# Altium PCB FPC_ADAPTOR.PcbDoc
Units mm, origin at the board's own origin, x right, y up, seen from the top; angles counter-clockwise.
Board outline 28.78 x 53.72 mm, 2 copper layers (Top Layer, Bottom Layer), stack 1.569 mm thick; 2 components, 40 nets, 82 pads, 0 vias.
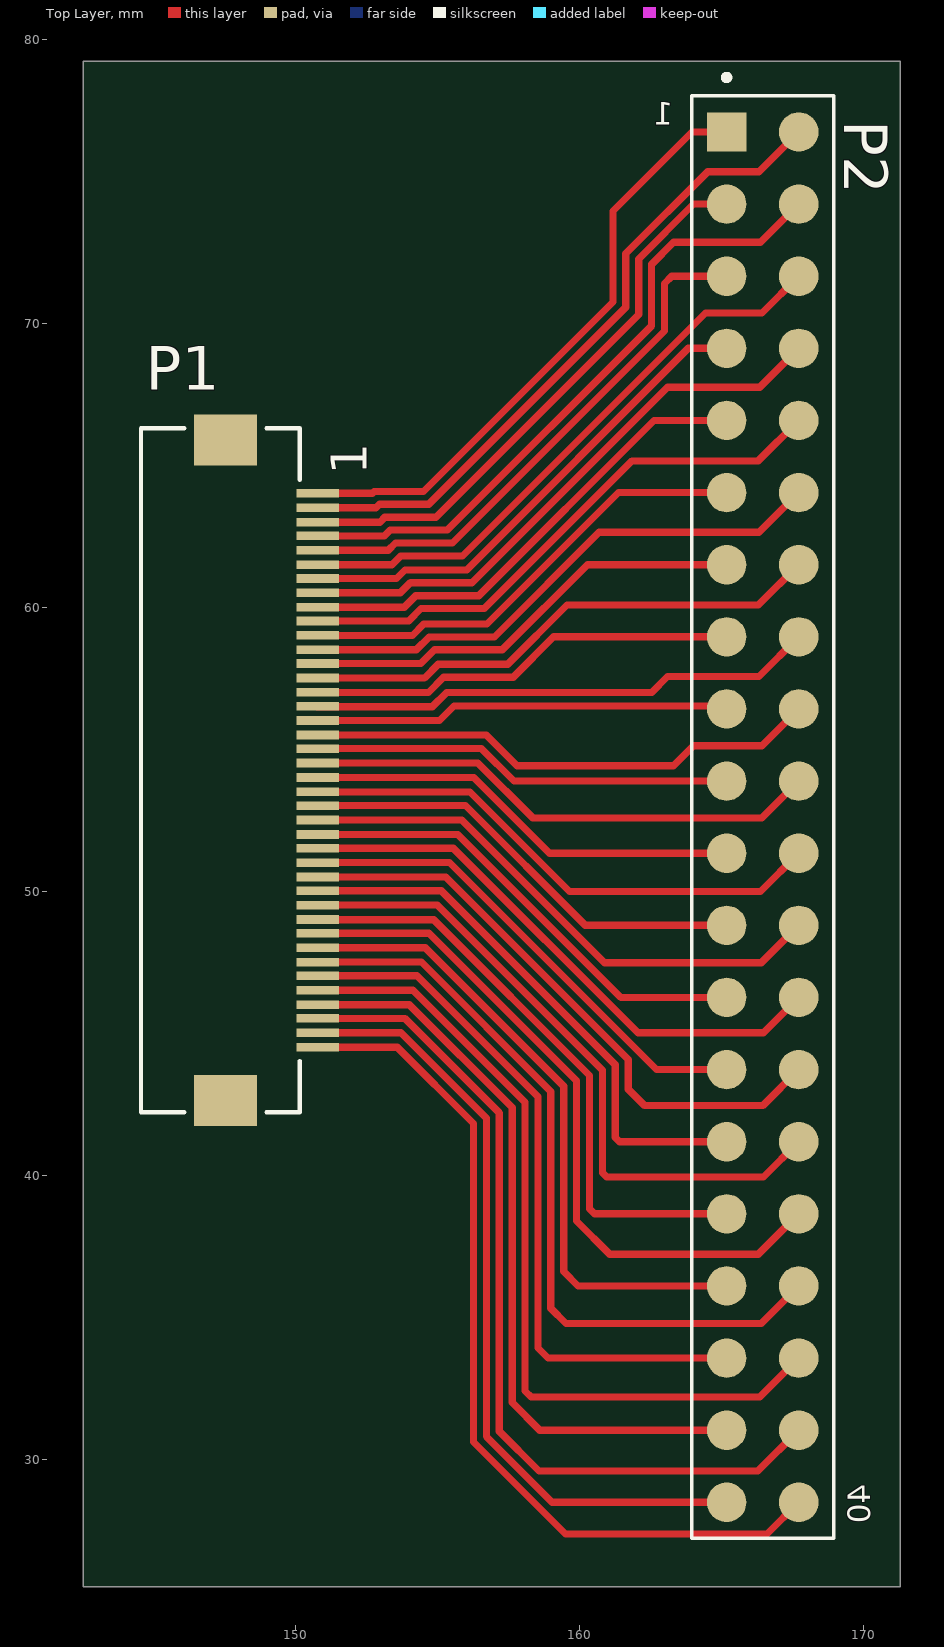
[diagram p0: Top Layer view]
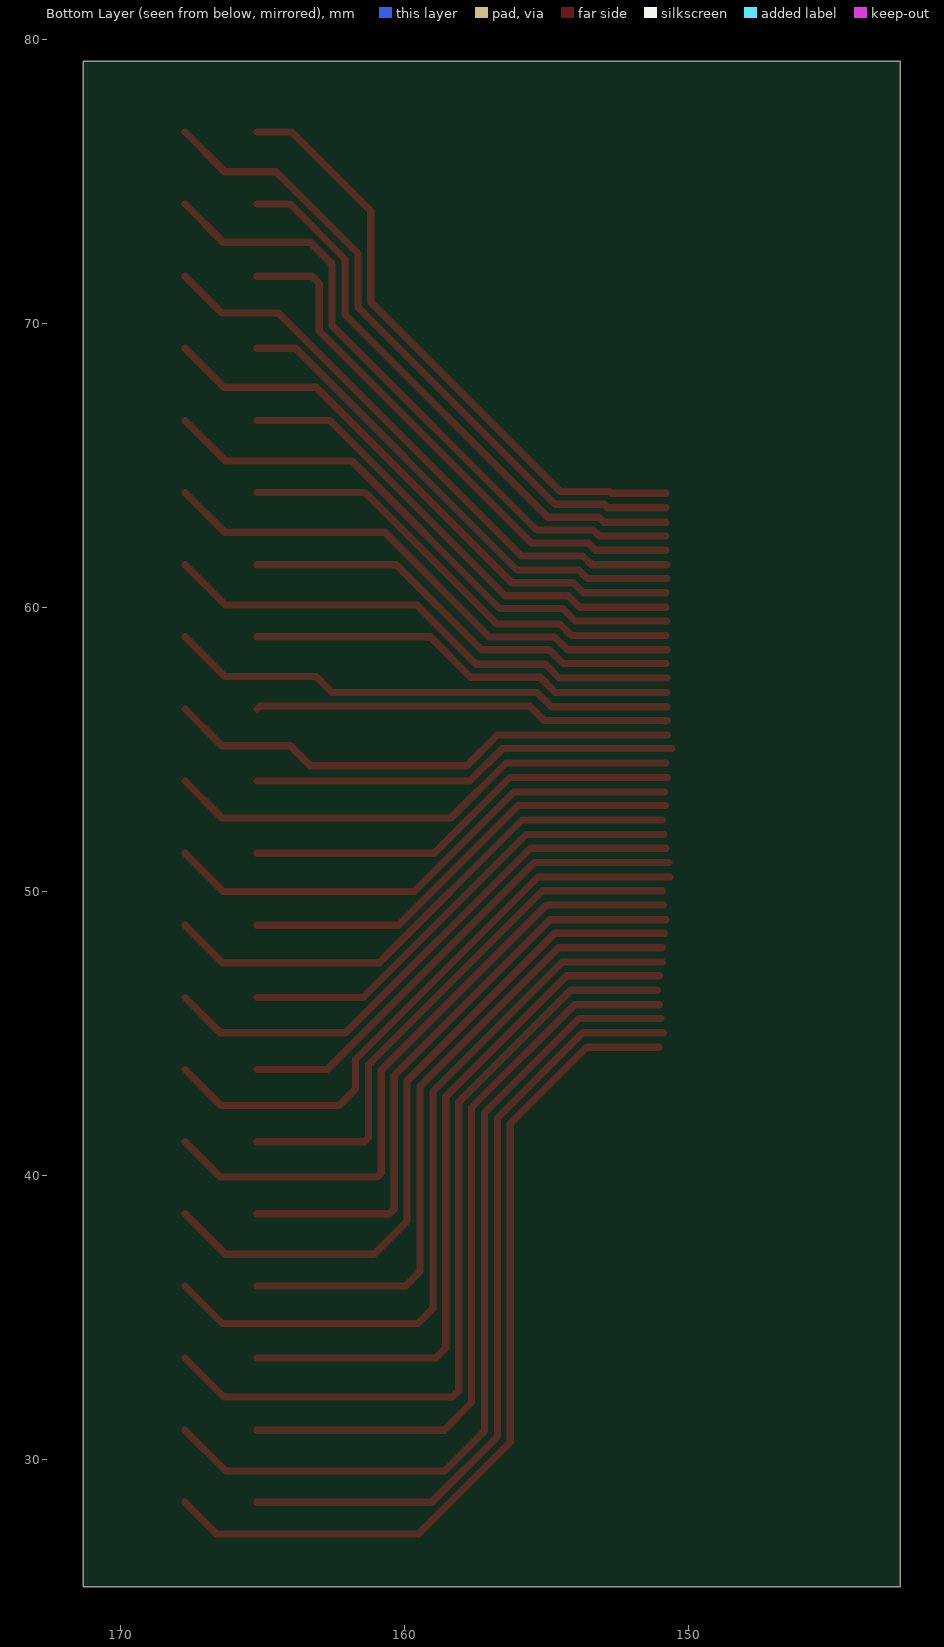
[diagram p1: Bottom Layer view, seen from below]

## Layer stack, top to bottom
Top Solder: solder mask 0.0254, SM-001, Dk 4
Top Layer: signal copper 0.035
Dielectric 1: core 1.4986, Core-043, Dk 4.3
Bottom Layer: signal copper 0.035
Bottom Solder: solder mask 0.0254, SM-001, Dk 4

## Board outline
142.519,25.527 142.519,79.248 171.298,79.248 171.298,25.527

## Design rules (kind name [scope] priority, off if disabled: settings)
Clearance [All] p1: gap=0.2 ignorepadtopadclearanceinfootprint=TRUE
PolygonConnect [All] p1: connectstyle=Relief reliefconductorwidth=0.254 reliefentries=4 polygonreliefangle="90 Angle" airgapwidth=0.254
RoutingVias [All] p1: holewidth=0.711 width=1.27 viastyle="Through Hole" minholewidth=0.711 minwidth=1.27 maxholewidth=0.711 maxwidth=1.27
SolderMaskExpansion [All] p1: expansion=0.102 istentingtop=FALSE
Width [All] p1: maxlimit=0.254 minlimit=0.01 preferedwidth=0.254 minimp=50.000000 maximp=50.000000 favimp=50.000000
30 further rules are at their usual default settings.

## Components (designator, comment, footprint, x,y, rotation, side; value= is the part's Value field where it differs from the comment)
P1 "FPC-40PIN" FPC-40PIN-0.5MM 147.542,53.458 r90 top
P2 "20X2" 2X20_FPC 166.466,52.724 r270 top value="20x2 header"

## Footprints (in the part's own frame and the unit in brackets; to place one, negate y for a bottom-side part, rotate by r counter-clockwise, add the part's x,y. Pads: shape width x height; smd on the part's side, far side on the other; paste and mask are expansions set on the pad)
2X20_FPC [mm]
  rect 1.39x1.39 smd: 1(-24.035,-1.29)
  round 1.39 smd: 2(-24.035,1.25) 3(-21.495,-1.29) 4(-21.495,1.25) 5(-18.955,-1.29) 6(-18.955,1.25) 7(-16.415,-1.29) 8(-16.415,1.25) 9(-13.875,-1.29) 10(-13.875,1.25) 11(-11.335,-1.29) 12(-11.335,1.25) 13(-8.795,-1.29) 14(-8.795,1.25) 15(-6.255,-1.29) 16(-6.255,1.25) 17(-3.715,-1.29) 18(-3.715,1.25) 19(-1.175,-1.29) 20(-1.175,1.25) 21(1.365,-1.29) 22(1.365,1.25) 23(3.905,-1.29) 24(3.905,1.25) 25(6.445,-1.29) 26(6.445,1.25) 27(8.985,-1.29) 28(8.985,1.25) 29(11.525,-1.29) 30(11.525,1.25) 31(14.065,-1.29) 32(14.065,1.25) 33(16.605,-1.29) 34(16.605,1.25) 35(19.145,-1.29) 36(19.145,1.25) 37(21.685,-1.29) 38(21.685,1.25) 39(24.225,-1.29) 40(24.225,1.25)
  silkscreen extent -26.05,-2.52 25.5,2.48
FPC-40PIN-0.5MM [mil]
  rect 12x59 smd: 1(416.36,-127.24) 2(396.36,-127.24) 3(376.36,-127.24) 4(357.36,-127.24) 5(337.36,-127.24) 6(317.36,-127.24) 7(298.36,-127.24) 8(278.36,-127.24) 9(258.36,-127.24) 10(239.36,-127.24) 11(219.36,-127.24) 12(199.36,-127.24) 13(180.36,-127.24) 14(160.36,-127.24) 15(140.36,-127.24) 16(121.36,-127.24) 17(101.36,-127.24) 18(81.36,-127.24) 19(62.36,-127.24) 20(42.36,-127.24) 21(22.36,-127.24) 22(2.36,-127.24) 23(-16.64,-127.24) 24(-36.64,-127.24) 25(-56.64,-127.24) 26(-75.64,-127.24) 27(-95.64,-127.24) 28(-115.64,-127.24) 29(-134.64,-127.24) 30(-154.64,-127.24) 31(-174.64,-127.24) 32(-193.64,-127.24) 33(-213.64,-127.24) 34(-233.64,-127.24) 35(-252.64,-127.24) 36(-272.64,-127.24) 37(-292.64,-127.24) 38(-311.64,-127.24) 39(-331.64,-127.24) 40(-351.64,-127.24)
  rect 71x87 smd: ""(-425.64,0.76) ""(490.36,0.76)
  silkscreen extent -442,-102 506,118

## Nets (pads, with @x,y where several pads share a name; then routed paths per layer and width w, separated by ;. In a path a pad name is that pad's centre, name@x,y a point inside that pad or via, vN(x,y) a via of type N, cw(c..) or ccw(c..) an arc to the next point about the centre after c; other vN are vias at no path point)
1: P1.1 P2.1 | length 21.5
  Top Layer w0.254: P1.1 152.696,64.033 152.762,64.099 154.498,64.099 161.173,70.774 161.173,73.974 163.957,76.759 P2.1
2: P1.2 P2.2 | length 23.5
  Top Layer w0.254: P1.2 152.83,63.525 152.95,63.645 154.686,63.645 161.627,70.586 161.627,72.476 164.512,75.362 166.319,75.362 P2.2
3: P1.3 P2.3 | length 20.2
  Top Layer w0.254: P1.3 152.964,63.017 153.138,63.191 154.94,63.191 162.081,70.332 162.081,72.288 164.011,74.219 P2.3
4: P1.4 P2.4 | length 23
  Top Layer w0.254: P1.4 153.124,62.535 153.326,62.737 155.336,62.737 162.535,69.936 162.535,72.1 163.307,72.873 166.37,72.873 P2.4
5: P1.5 P2.5 | length 19.4
  Top Layer w0.254: P1.5 153.258,62.027 153.514,62.283 155.524,62.283 162.989,69.748 162.989,71.422 163.246,71.679 P2.5
6: P1.6 P2.6 | length 21.2
  Top Layer w0.254: P1.6@150.749,61.519 P1.6 153.392,61.519 153.702,61.829 155.874,61.829 164.428,70.383 166.421,70.383 P2.6
7: P1.7 P2.7 | length 17.8
  Top Layer w0.254: P1.7@150.749,61.036 P1.7 153.551,61.036 153.85,61.335 156.022,61.335 163.826,69.139 P2.7
8: P1.8 P2.8 | length 20.5
  Top Layer w0.254: P1.8 153.685,60.528 154.038,60.881 156.21,60.881 163.096,67.767 166.345,67.767 P2.8
9: P1.9 P2.9 | length 17.1
  Top Layer w0.254: P1.9 153.819,60.02 154.226,60.427 156.45,60.427 162.622,66.599 P2.9
10: P1.10 P2.10 | length 19.9
  Top Layer w0.254: P1.10@150.749,59.538 P1.10 153.979,59.538 154.414,59.973 156.638,59.973 161.842,65.176 166.294,65.176 P2.10
11: P1.11 P2.11 | length 16.5
  Top Layer w0.254: P1.11 154.113,59.03 154.513,59.43 156.737,59.43 161.366,64.059 P2.11
12: P1.12 P2.12 | length 19.3
  Top Layer w0.254: P1.12@150.749,58.522 P1.12 154.247,58.522 154.701,58.976 156.997,58.976 160.684,62.662 166.319,62.662 P2.12
13: P1.13 P2.13 | length 15.8
  Top Layer w0.254: P1.13 154.406,58.039 154.889,58.522 157.277,58.522 160.274,61.519 P2.13
14: P1.14 P2.14 | length 18.6
  Top Layer w0.254: P1.14@150.749,57.531 P1.14 154.54,57.531 155.02,58.01 157.47,58.01 159.556,60.096 166.294,60.096 P2.14
15: P1.15 P2.15 | length 15.2
  Top Layer w0.254: P1.15@150.749,57.023 P1.15 154.674,57.023 155.208,57.556 157.658,57.556 159.08,58.979 P2.15
16: P1.16 P2.16 | length 18
  Top Layer w0.254: P1.16@150.749,56.515 154.808,56.515 155.316,57.023 162.538,57.023 163.097,57.582 166.319,57.582 P2.16
17: P1.17 P2.17 | length 14.7
  Top Layer w0.254: P1.17@150.724,56.032 P1.17 ; P1.17@150.8,56.007 P1.17 ; P2.17 165.075,56.54 155.575,56.54 155.067,56.032 P1.17
18: P1.18 P2.18 | length 18.3
  Top Layer w0.254: P1.18@150.724,55.524 P1.18 156.707,55.524 157.792,54.439 163.304,54.439 164.008,55.143 166.421,55.143 P2.18
19: P1.19 P2.19 | length 15.1
  Top Layer w0.254: P1.19@150.571,55.042 P1.19 156.547,55.042 157.69,53.899 P2.19
20: P1.20 P2.20 | length 18.3
  Top Layer w0.254: P1.20 156.413,54.534 158.344,52.603 166.421,52.603 P2.20
21: P1.21 P2.21 | length 15.6
  Top Layer w0.254: P1.21@150.724,54.026 P1.21 156.272,54.026 158.939,51.359 P2.21
22: P1.22 P2.22 | length 18.9
  Top Layer w0.254: P1.22@150.825,53.518 156.138,53.518 159.643,50.013 166.37,50.013 P2.22
23: P1.23 P2.23 | length 16.1
  Top Layer w0.254: P1.23@150.8,53.035 155.979,53.035 160.195,48.819 P2.23
24: P1.24 P2.24 | length 19.4
  Top Layer w0.254: P1.24@150.901,52.527 155.845,52.527 160.874,47.498 166.395,47.498 P2.24
25: P1.25 P2.25 | length 16.7
  Top Layer w0.254: P1.25@150.851,52.019 155.711,52.019 161.451,46.279 P2.25
26: P1.26 P2.26 | length 20.2
  Top Layer w0.254: P1.26 155.551,51.537 162.053,45.034 166.472,45.034 P2.26
27: P1.27 P2.27 | length 17.5
  Top Layer w0.254: P1.27@150.673,51.029 P1.27 155.417,51.029 162.707,43.739 P2.27
28: P1.28 P2.28 | length 21.5
  Top Layer w0.254: P1.28@150.647,50.521 P1.28 155.283,50.521 161.709,44.095 161.709,43.049 162.29,42.469 166.446,42.469 P2.28
29: P1.29 P2.29 | length 19.4
  Top Layer w0.254: P1.29@150.901,50.038 155.124,50.038 161.255,43.907 161.255,41.348 161.404,41.199 P2.29
30: P1.30 P2.30 | length 23.4
  Top Layer w0.254: P1.30@150.876,49.53 154.989,49.53 160.801,43.718 160.801,40.103 160.95,39.954 166.472,39.954 P2.30
31: P1.31 P2.31 | length 21.4
  Top Layer w0.254: P1.31 150.778,49.019 154.859,49.019 160.347,43.53 160.347,38.837 160.525,38.659 P2.31
32: P1.32 P2.32 | length 25.1
  Top Layer w0.254: P1.32@150.825,48.539 154.696,48.539 159.893,43.342 159.893,38.405 161.061,37.236 166.294,37.236 P2.32
33: P1.33 P2.33 | length 23
  Top Layer w0.254: P1.33@150.901,48.031 154.562,48.031 159.439,43.155 159.439,36.623 159.943,36.119 P2.33
34: P1.34 P2.34 | length 27.1
  Top Layer w0.254: P1.34@150.901,47.523 154.428,47.523 158.985,42.966 158.985,35.331 159.518,34.798 166.395,34.798 P2.34
35: P1.35 P2.35 | length 24.9
  Top Layer w0.254: P1.35@151.003,47.041 154.268,47.041 158.531,42.778 158.531,33.934 158.886,33.579 P2.35
36: P1.36 P2.36 | length 29.1
  Top Layer w0.254: P1.36@151.079,46.533 154.134,46.533 158.077,42.59 158.077,32.423 158.293,32.207 166.345,32.207 P2.36
37: P1.37 P2.37 | length 26.5
  Top Layer w0.254: P1.37@151.003,46.025 154,46.025 157.623,42.402 157.623,32.014 158.598,31.039 P2.37
38: P1.38 P2.38 | length 30.5
  Top Layer w0.254: P1.38@150.952,45.542 153.841,45.542 157.169,42.214 157.169,31 158.57,29.598 166.275,29.598 P2.38
39: P1.39 P2.39 | length 27.7
  Top Layer w0.254: P1.39@150.876,45.034 153.707,45.034 156.715,42.026 156.715,30.811 159.027,28.499 P2.39
40: P1.40 P2.40 | length 30.8
  Top Layer w0.254: P1.40@151.028,44.526 153.573,44.526 156.261,41.838 156.261,30.623 159.503,27.381 166.599,27.381 P2.40
pads on no net: P1.

## Silkscreen, mask and mechanical layers (free items; w line width, h text height)
Top Overlay:
  text "1" at 163.297,77.013 h0.8
  text "40" at 170.231,29.134 h0.8 r90
Mechanical 13:
  lines w0.1: 171.298,25.527 142.519,25.527 142.519,50.508 142.519,58.204 142.519,79.248 171.298,79.248 171.298,59.315 171.298,54.251 171.298,25.552

## Text inside footprints (layer, text, board x,y; h text height)
P1: Top Overlay "1" at 152.502,64.694 h1.27 r90; Mechanical 13 "1" at 153.162,63.553 h1.27 r90